# EAGLE board board (EAGLE 9.6.2)

Size 17 x 12.8 mm. Coordinates in mm from the lower left corner, seen from the top.
Copper layers (1*16): Top 0.035mm / dielectric 1.5mm / Bottom 0.035mm
Design rules "default": minimum track width 6mil, minimum drill 0.35mm, track to track 6mil, track to pad 6mil, pad to pad 6mil, via to via 6mil, smd to smd 6mil, copper to edge 40mil, drill to drill 6mil, minimum pad ring 10mil, minimum via ring 8mil, stop-mask expansion 4mil, vias tented up to drill 0mil, thermal gap 10mil

## Footprints (pad centres in the part's own frame; a part is rotated, then mirrored left to right if it is on the bottom)
POLOLU-DRV8833 = drill 0.8: AISEN -3.81,-7.62; BINSEN -3.81,-10.16; FLT 6.35,-10.16; INA1 6.35,-5.08; INA2 6.35,-2.54; INB1 6.35,2.54; INB2 6.35,0; OA1 -3.81,-5.08; OA2 -3.81,-2.54; OB1 -3.81,2.54; OB2 -3.81,0; SLP 6.35,-7.62; VIN -3.81,5.08; VMM 6.35,5.08 | drill 0.8 square: GND1 -3.81,7.62; GND2 6.35,7.62
TSOP17_TB1 = drill 1 pad 1.676: GND 0,-3.81; VO 0,3.81; VS 0,-1.27
ARDUINO-NANO-3.0#ISP = drill 1 square: J1.1 17.78,7.62; J4.1 20.32,-2.54 | drill 1: J1.2 15.24,7.62; J1.3 12.7,7.62; J1.4 10.16,7.62; J1.5 7.62,7.62; J1.6 5.08,7.62; J1.7 2.54,7.62; J1.8 0,7.62; J1.9 -2.54,7.62; J1.10 -5.08,7.62; J1.11 -7.62,7.62; J1.12 -10.16,7.62; J1.13 -12.7,7.62; J1.14 -15.24,7.62; J1.15 -17.78,7.62; J2.1 17.78,-7.62; J2.2 15.24,-7.62; J2.3 12.7,-7.62; J2.4 10.16,-7.62; J2.5 7.62,-7.62; J2.6 5.08,-7.62; J2.7 2.54,-7.62; J2.8 0,-7.62; J2.9 -2.54,-7.62; J2.10 -5.08,-7.62; J2.11 -7.62,-7.62; J2.12 -10.16,-7.62; J2.13 -12.7,-7.62; J2.14 -15.24,-7.62; J2.15 -17.78,-7.62; J4.2 17.78,-2.54; J4.3 20.32,0; J4.4 17.78,0; J4.5 20.32,2.54; J4.6 17.78,2.54 | hole 1.651: -20.32,7.62; -20.32,-7.62; 20.32,-7.62; 20.32,7.62
1X06 = drill 1.016 long: 1 -6.35,0; 2 -3.81,0; 3 -1.27,0; 4 1.27,0; 5 3.81,0; 6 6.35,0
DCJ0303 = drill 1 pad 2 long: 1 0,3.1; 2 4.8,0; 3 0,-3

## Placement (x,y rotation side)
DRV8833  [POLOLU-DRV8833]  45.57,3.86 270 top  (outside the outline)
IR1  TSOP1730TB1  [TSOP17_TB1]  18.9,6.4 0 top
M1  ARDUINO-NANO-3.0#ISP  [ARDUINO-NANO-3.0#ISP]  86.21,2.59 180 top  (outside the outline)
N20-ENCODER  PINHD-1X6  [1X06]  6.2,-39.32 0 top  (outside the outline)
POWER  12V / 1.5A  [DCJ0303]  76.05,-24.08 0 top  (outside the outline)

## Library data of the parts
DRV8833 = Pololu_Driver_DRV8833
IR1 = telefunken; OC_FARNELL: unknown; OC_NEWARK: unknown
M1 = diy-modules
N20-ENCODER = Connector; CATEGORY: CONNECTOR; SUB-CATEGORY: PIN-HEADER
POWER = con-jack; OC_FARNELL: unknown; OC_NEWARK: unknown

## Nets
3V3: M1.J2.14
ARDUINO_GROUND: M1.J2.2
ARDUINO_VOLTAGE: M1.J2.4
DRIVER_GROUND: DRV8833.GND1 DRV8833.GND2
DRIVER_VOLTAGE_CONTROL: DRV8833.VIN
DRIVER_VOLTAGE_MOTOR: DRV8833.VMM
ENC_A: M1.J1.11 N20-ENCODER.3
ENC_B: M1.J1.10 N20-ENCODER.4
ENC_GND: N20-ENCODER.2
ENC_VCC: N20-ENCODER.5
GND.1: M1.J1.4
IR_GROUND: IR1.GND
IR_SIGNAL: IR1.VS M1.J1.12
IR_VOLTAGE: IR1.VO
MOTOR_CONTROL_1: DRV8833.INA1 M1.J1.8
MOTOR_CONTROL_2: DRV8833.INA2 M1.J1.9
MOTOR_V1: DRV8833.OA2 N20-ENCODER.6
MOTOR_V2: DRV8833.OA1 N20-ENCODER.1
POWER_GND: POWER.3
POWER_VCC: M1.J2.1 POWER.1

## Tracks (layer width: path | path; a pad name or v marks a point on that pad's centre or on a via)
DRIVER_GROUND  (1 unrouted)
ENC_A  (1 unrouted)
ENC_B  (1 unrouted)
IR_SIGNAL  (1 unrouted)
MOTOR_CONTROL_1  (1 unrouted)
MOTOR_CONTROL_2  (1 unrouted)
MOTOR_V1  (1 unrouted)
MOTOR_V2  (1 unrouted)
POWER_VCC  (1 unrouted)